# Altium PCB myMeteo_v0.PcbDoc
Units mm, origin at the board's own origin, x right, y up, seen from the top; angles counter-clockwise.
Board outline 72 x 30 mm, 4 copper layers (TOP, GND, PWR, BOT), stack 1.748 mm thick; 72 components, 64 nets, 324 pads, 142 vias.
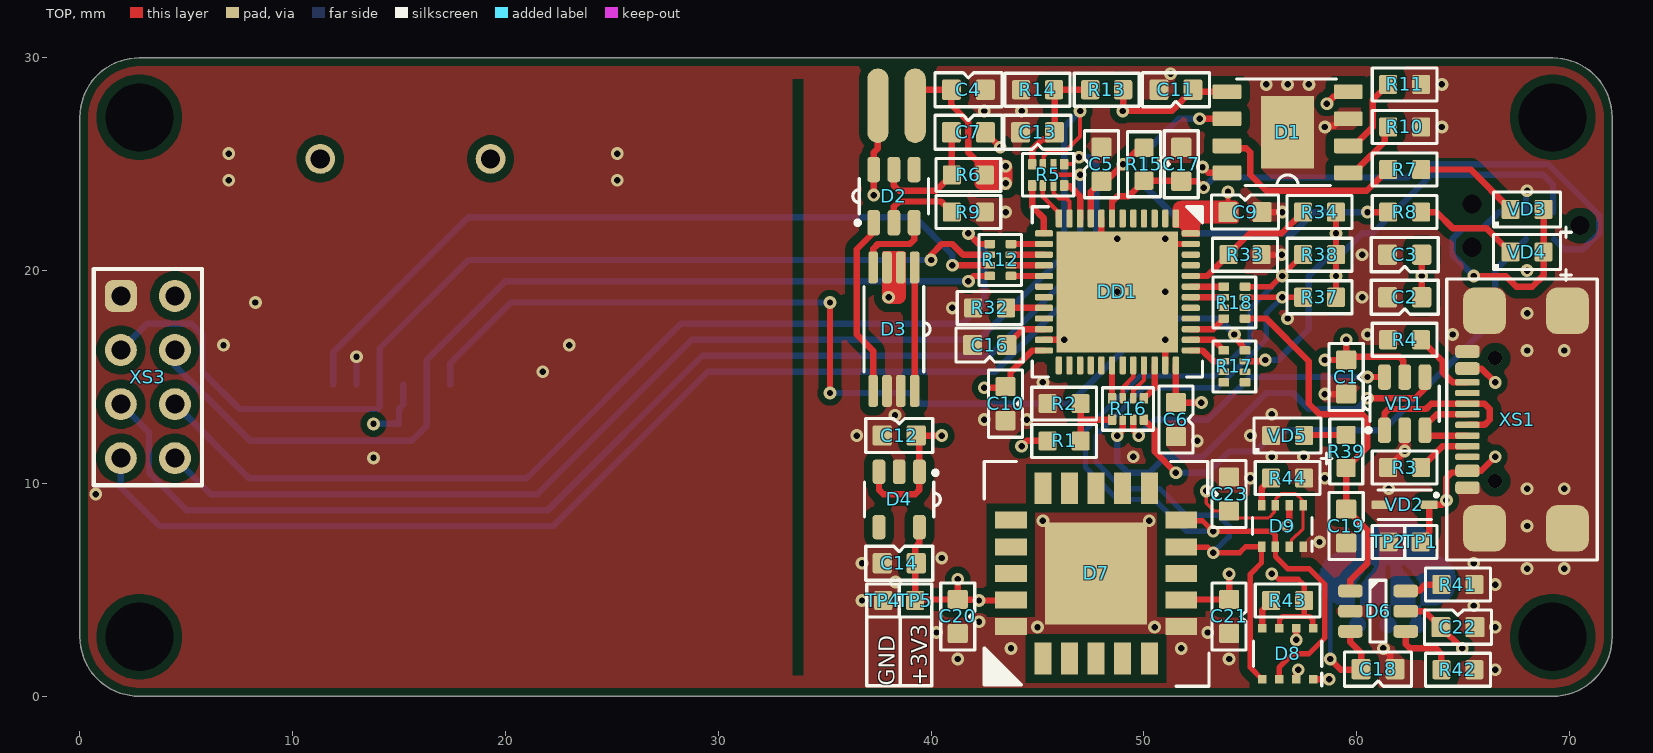
[diagram p0: TOP view]
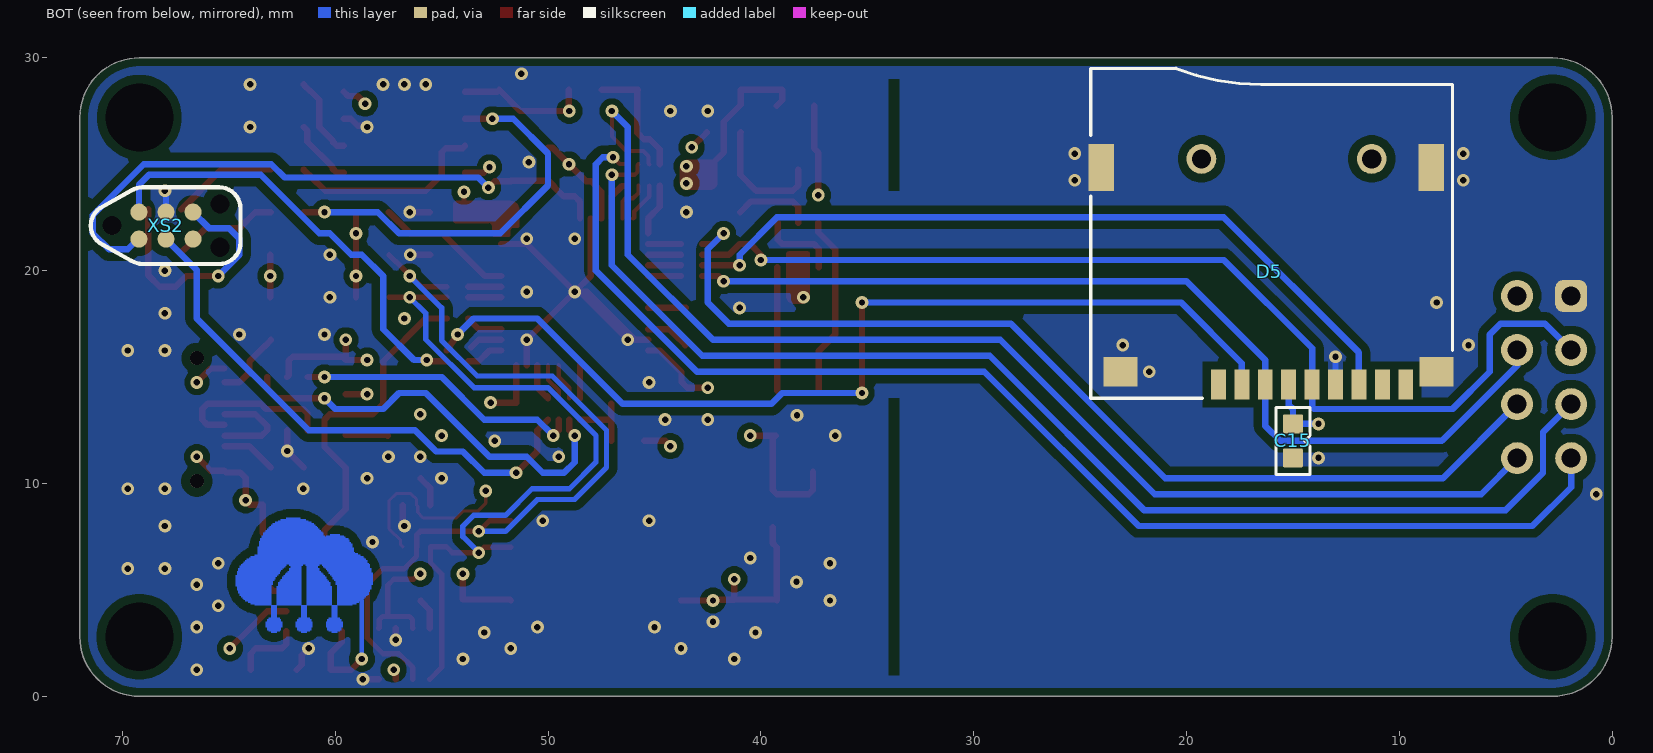
[diagram p1: BOT view, seen from below]
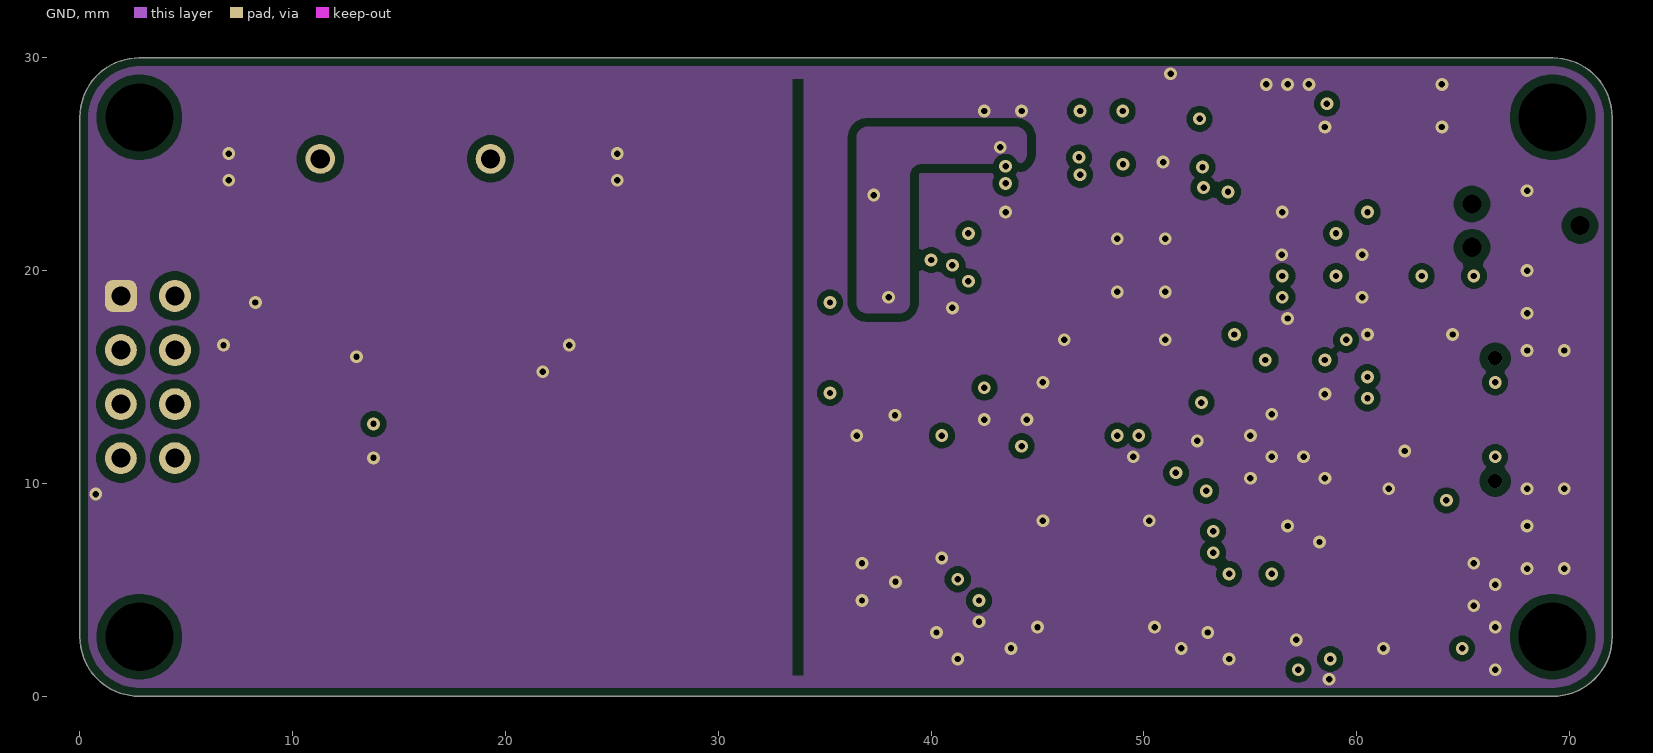
[diagram p2: GND]
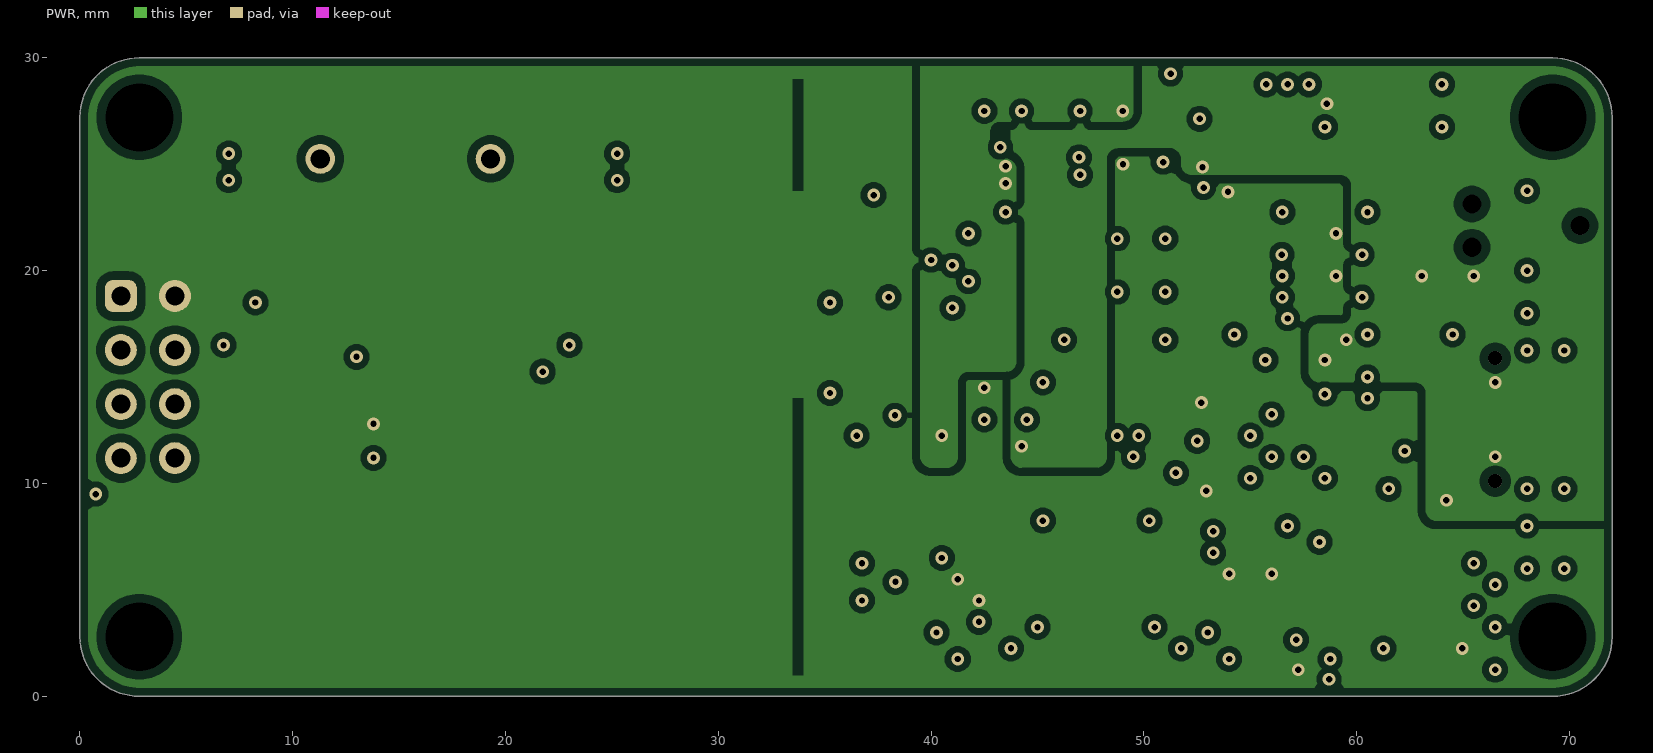
[diagram p3: PWR]
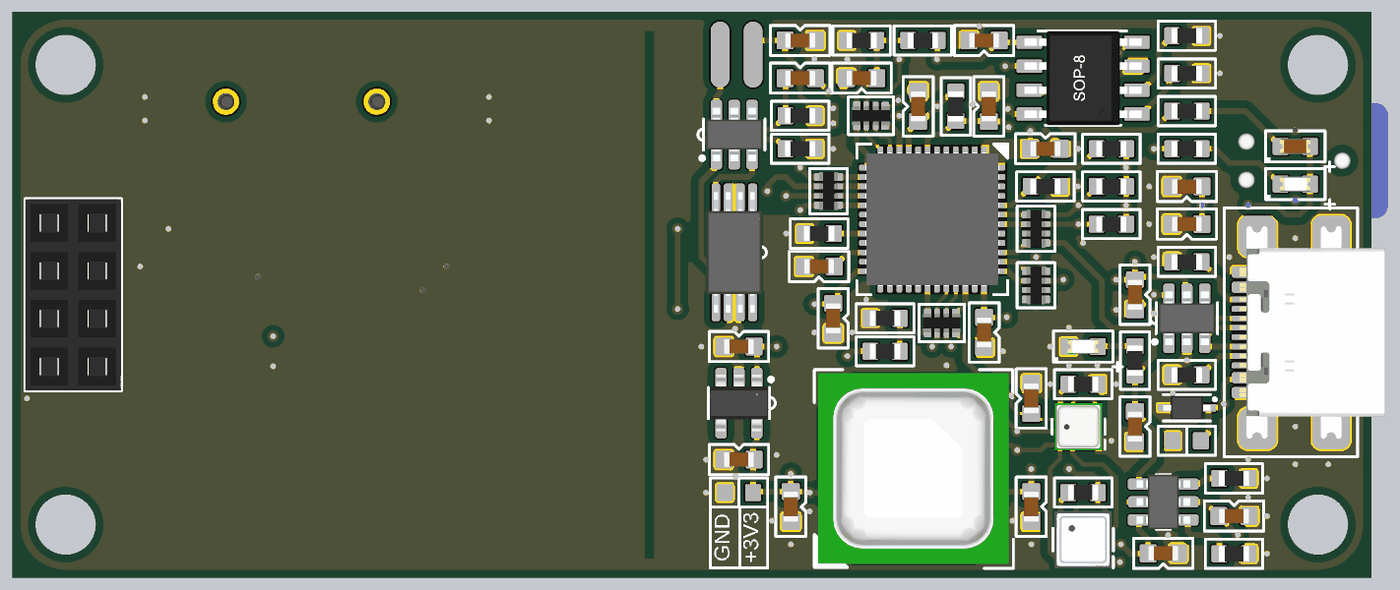
[diagram p4: 3D render of the assembled board from above, using the file's embedded part models]
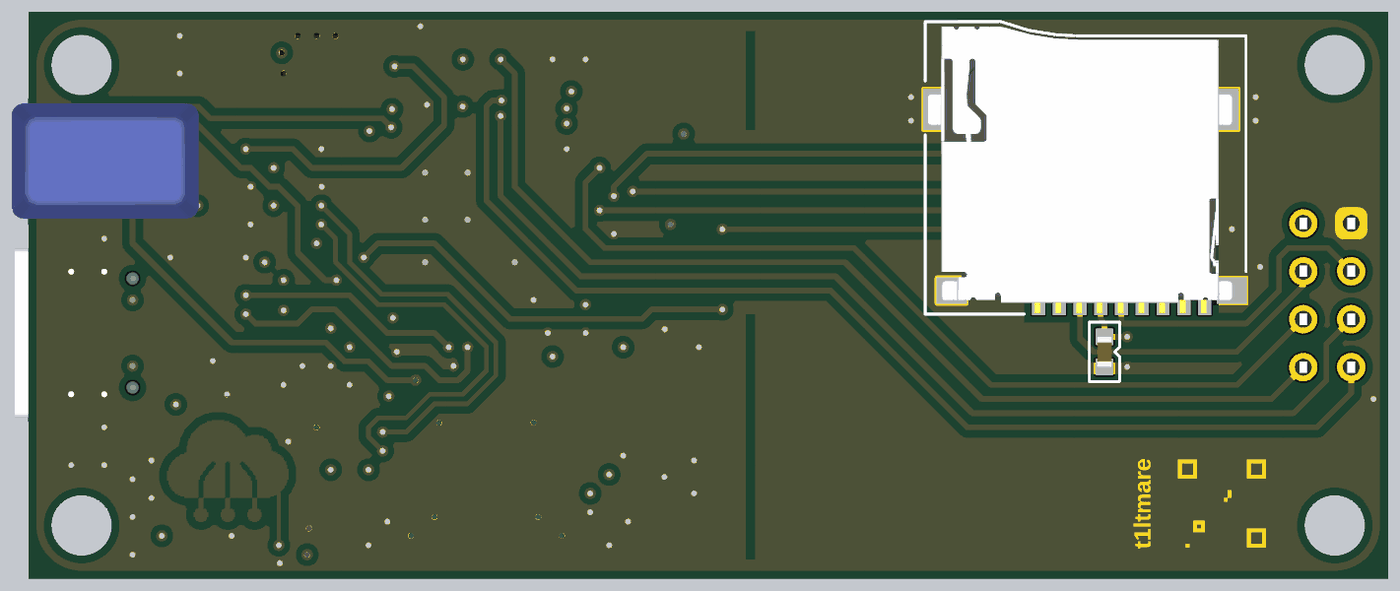
[diagram p5: 3D render of the assembled board from below, using the file's embedded part models]

## Layer stack, top to bottom
Top Solder: solder mask 0.0102, Solder Resist, Dk 3.5
TOP: signal copper 0.018
Dielectric 2: prepreg 0.0711, PP-006, Dk 4.1
GND: signal copper 0.035
Dielectric 1: dielectric 1.5, FR-4, Dk 4.8
PWR: signal copper 0.035
Dielectric 3: prepreg 0.0711, PP-006, Dk 4.1
BOT: signal copper 0.018
Bottom Solder: solder mask 0.0102, Solder Resist, Dk 3.5

## Board outline
2.8,0 cw(c2.8,2.8) 0,2.8 0,27.2 cw(c2.8,27.2) 2.8,30 69.2,30 cw(c69.2,27.2) 72,27.2 72,2.8 cw(c69.199,2.801) 69.2,0

## Design rules (kind name [scope] priority, off if disabled: settings)
AcuteAngle [All] p1: minimum=3.50000000000000E+0001 checktracksonly=FALSE
BoardOutlineClearance "BoardOutlineClearance 2" [All] p1: gap=0.4 ignorepadtopadclearanceinfootprint=FALSE // V-Cut
Clearance [All] p1: gap=0.2 ignorepadtopadclearanceinfootprint=FALSE except(0.15: Track-SMDPad Track-THPad SMDPad-SMDPad SMDPad-THPad THPad-THPad; 0.25: Arc-Hole Track-Hole SMDPad-Hole THPad-Hole Via-Hole Fill-Hole Region-Hole Text-Hole; 0.3: Via-Poly; 0.4: Arc-Poly Track-Poly SMDPad-Poly THPad-Poly Fill-Poly Poly-Poly Poly-Region Poly-Text Poly-Hole)
ComponentClearance [All] p1: gap=0 collisioncheckmode=3 verticalgap=0 showdistances=FALSE
DiffPairsRouting "DiffPairsRouting 1 Oz" [All] p1: maxlimit=0.254 minlimit=0.2 mostfreqgap=0.254 toplayer_minwidth=0.2 toplayer_maxwidth=0.381 toplayer_prefwidth=0.381 midlayer1_minwidth=0.2 midlayer1_maxwidth=0.381 midlayer1_prefwidth=0.381 midlayer2_minwidth=0.2 midlayer2_maxwidth=0.381 midlayer2_prefwidth=0.381 bottomlayer_minwidth=0.2 bottomlayer_maxwidth=0.381 bottomlayer_prefwidth=0.381 maxuncoupledlength=12.7
DiffPairsRouting "DiffPairsRouting 1/2 Oz" [All] p2: maxlimit=0.254 minlimit=0.1 mostfreqgap=0.254 toplayer_minwidth=0.1 toplayer_maxwidth=0.381 toplayer_prefwidth=0.381 midlayer1_minwidth=0.1 midlayer1_maxwidth=0.381 midlayer1_prefwidth=0.381 midlayer2_minwidth=0.1 midlayer2_maxwidth=0.381 midlayer2_prefwidth=0.381 bottomlayer_minwidth=0.1 bottomlayer_maxwidth=0.381 bottomlayer_prefwidth=0.381 maxuncoupledlength=12.7
Height [All] p1: minheight=0 maxheight=40 prefheight=12.7
HoleSize "Minimum HoleSize" [IsPad] p1: absolutevalues=TRUE maxlimit=5.9 minlimit=0.3 maxpercent=80.000 minpercent=20.000
HoleSize "Minimum HoleSize VIA 1" [IsVia] p2: absolutevalues=TRUE maxlimit=5.9 minlimit=0.3 maxpercent=80.000 minpercent=20.000 // Standart
HoleToHoleClearance Hole2HoleClearance [All] p1: gap=0 allowstackedmicrovias=FALSE
MinimumAnnularRing "Minimum AR VIA Standart" [IsVia] p1: minimumring=0.15
MinimumAnnularRing "Minimum AR PAD Standart" [IsPAD] p2: minimumring=0.1
MinimumSolderMaskSliver "SolderMask Bridge Advance" [All] p1: minsoldermaskwidth=0.2 // Mask LDI
PlaneClearance "PlaneClearance 3 Oz" [All] p1: clearance=0.25
PlaneConnect "TermalConnect 2 Oz" [All] p1: planeconnectstyle=Direct reliefexpansion=0.2 reliefentries=4 reliefconductorwidth=0.2 reliefairgap=0.2 // Standart
PolygonConnect "PolygonConnect-1 1 Oz_1" [All] p1: connectstyle=Direct reliefconductorwidth=0.2 reliefentries=4 polygonreliefangle="90 Angle" airgapwidth=0.2 // Standart
RoutingCorners [All] p1 off: cornerstyle=45-Degree minsetback=2.54 maxsetback=2.54
RoutingVias [All] p1: holewidth=0.3 width=0.6 viastyle="Through Hole" minholewidth=0.2 minwidth=0.4 maxholewidth=5.9 maxwidth=6.4
SMDEntry [All] p1: side=FALSE corner=FALSE anyangle=TRUE
SMDToCorner [All] p1: distance=0
SilkToSilkClearance Silk2SilkClearance [All] p1 off: silktosilkclearance=0.15
SilkToSolderMaskClearance Silk2SolderMaskClearance [IsPad] p1 off: minsilkscreentomaskgap=0.15 clearancetoexposedcopper=TRUE
SolderMaskExpansion [InPadClass('All Pads')] p1: expansion=0.1 istentingtop=FALSE
SolderMaskExpansion SolderMaskExpansion-1 [All] p2: expansion=0.1 istentingtop=FALSE // Standart
SupplyNets "Schematic Supply Nets_4" [InNet('GNDB')] p1: voltage=0.000
SupplyNets "Schematic Supply Nets_3" [InNet('GND')] p2: voltage=0.000
SupplyNets "Schematic Supply Nets_2" [InNet('+5V')] p3: voltage=0.000
SupplyNets "Schematic Supply Nets_1" [InNet('+3V3')] p4: voltage=0.000
SupplyNets "Schematic Supply Nets" [InNet('+4V2_BAT')] p5: voltage=0.000
Width "Width 1 Oz" [All] p1: maxlimit=10 minlimit=0.15 preferedwidth=0.3 checkconnectedcopper=TRUE
19 further rules are at their usual default settings.

## Classes and differential pairs
component class Sensors: C18 C19 C20 C21 C22 C23 D6 D7 D8 D9 R39 R41 R42 R43 R44 VD5
component class Power: C1 C2 C3 C4 C5 C6 C7 C9 C10 C11 C12 C13 C14 D1 D2 D3 D4 R1 R2 R3 R4 R6 R7 R8 R9 R10 R11 R13 R14 TP1 TP2 TP4 TP5 VD1 VD2 VD3 VD4 XS1
component class MCU: C15 C16 C17 D5 DD1 R5 R12 R15 R16 R17 R18 R32 R33 R34 R37 R38 XS2 XS3

## Components (designator, comment, footprint, x,y, rotation, side; value= is the part's Value field where it differs from the comment)
C1 "CAPACITOR" CAP_0603 59.5,15 r270 top value=0,1uF
C2 "CAPACITOR" CAP_0603 62.25,18.75 r180 top value=10,0uF
C3 "CAPACITOR" CAP_0603 62.25,20.75 r180 top value=0,1uF
C4 "CAPACITOR" CAP_0603 41.75,28.5 r0 top value=10,0uF
C5 "CAPACITOR" CAP_0603 48,25 r90 top value=0,1uF
C6 "CAPACITOR" CAP_0603 51.5,13 r270 top value=0,1uF
C7 "CAPACITOR" CAP_0603 41.75,26.5 r0 top value=0,1uF
C9 "CAPACITOR" CAP_0603 54.75,22.75 r0 top value=0,1uF
C10 "CAPACITOR" CAP_0603 43.5,13.75 r270 top value=0,1uF
C11 "CAPACITOR" CAP_0603 51.5,28.5 r180 top value=0,1uF
C12 "CAPACITOR" CAP_0603 38.5,12.25 r0 top value=1,0uF
C13 "CAPACITOR" CAP_0603 45,26.5 r180 top value=0,1uF
C14 "CAPACITOR" CAP_0603 38.5,6.25 r0 top value=1,0uF
C15 "CAPACITOR" CAP_0603 15,12 r270 bottom value=0,1uF
C16 "CAPACITOR" CAP_0603 42.75,16.5 r180 top value=2,2uF
C17 "CAPACITOR" CAP_0603 51.75,25 r90 top value=0,1uF
C18 "CAPACITOR" CAP_0603 61,1.275 r180 top value=22pF
C19 "CAPACITOR" CAP_0603 59.5,8 r270 top value=10,0uF
C20 "CAPACITOR" CAP_0603 41.25,3.75 r270 top value=0,1uF
C21 "CAPACITOR" CAP_0603 54,3.75 r270 top value=0,1uF
C22 "CAPACITOR" CAP_0603 64.75,3.25 r0 top value=0,1uF
C23 "CAPACITOR" CAP_0603 54,9.5 r90 top value=0,1uF
D1 "TP4056" ESOP-8 56.75,26.5 r180 top
D2 "DW01A" SOT-23-6 38.25,23.5 r90 top
D3 "FS8205A" TSSOP-8 38.25,17.25 r270 top
D4 "TPS7A02" SOT-23-5 38.5,9.25 r270 top
D5 "KLS1-TF-003" KLS1-TF-003 16.25,25.25 r0 bottom
D6 "TTP223-BA6" SOT-23-6L_1 61,4 r0 top
D7 "SCD41" SCD41 47.75,5.775 r90 top
D8 "BME_SENSOR" BME688 56.75,2 r270 top value=BME688
D9 "BME_SENSOR" BME280 56.5,8 r270 top value=BME280
DD1 "STM32F411CEU6" UFQFPN48 48.75,19 r270 top
R1 "RESISTOR" RES_0603 46.25,12 r180 top value=6,2K
R2 "RESISTOR" RES_0603 46.25,13.75 r0 top value=12K
R3 "RESISTOR" RES_0603 62.25,10.75 r180 top value=5,1K
R4 "RESISTOR" RES_0603 62.25,16.75 r180 top value=5,1K
R5 "RESISTOR_ARRAY" RES_ARRAY_0804_CONVEX 45.5,24.5 r180 top value=33
R6 "RESISTOR" RES_0603 41.75,24.5 r180 top value=100
R7 "RESISTOR" RES_0603 62.25,24.75 r180 top value=3K
R8 "RESISTOR" RES_0603 62.25,22.75 r180 top value=3K
R9 "RESISTOR" RES_0603 41.75,22.75 r180 top value=1K
R10 "RESISTOR" RES_0603 62.25,26.75 r0 top value=0
R11 "RESISTOR" RES_0603 62.25,28.75 r0 top value=5,1K
R12 "RESISTOR_ARRAY" RES_ARRAY_0804_CONVEX 43.25,20.5 r270 top value=33
R13 "RESISTOR" RES_0603 48.25,28.5 r0 top value=2,7K
R14 "RESISTOR" RES_0603 45,28.5 r0 top value=3,9K
R15 "RESISTOR" RES_0603 50,25 r90 top value=10K
R16 "RESISTOR_ARRAY" RES_ARRAY_0804_CONVEX 49.25,13.5 r0 top value=33
R17 "RESISTOR_ARRAY" RES_ARRAY_0804_CONVEX 54.25,15.5 r90 top value=33
R18 "RESISTOR_ARRAY" RES_ARRAY_0804_CONVEX 54.25,18.5 r270 top value=33
R32 "RESISTOR" RES_0603 42.75,18.25 r180 top value=10K
R33 "RESISTOR" RES_0603 54.75,20.75 r0 top value=10K
R34 "RESISTOR" RES_0603 58.25,22.75 r0 top value=-
R37 "RESISTOR" RES_0603 58.25,18.75 r0 top value=5,1K
R38 "RESISTOR" RES_0603 58.25,20.75 r0 top value=5,1K
R39 "RESISTOR" RES_0603 59.5,11.5 r270 top value=3K
R41 "RESISTOR" RES_0603 64.75,5.25 r0 top value=100
R42 "RESISTOR" RES_0603 64.75,1.25 r0 top value=100
R43 "RESISTOR" RES_0603 56.75,4.5 r0 top value=10K
R44 "RESISTOR" RES_0603 56.75,10.25 r0 top value=10K
TP1 "TEST_POINT" TP-SMD-R0.9x0.85 63,7.25 r0 top value=TP
TP2 "TEST_POINT" TP-SMD-R0.9x0.85 61.5,7.25 r180 top value=TP
TP4 "TEST_POINT" TP-SMD-R0.9x0.85 37.75,4.5 r180 top value=TP
TP5 "TEST_POINT" TP-SMD-R0.9x0.85 39.25,4.5 r0 top value=TP
VD1 "USBLC6-2SC6" SOT-23-6 62.25,13.75 r90 top
VD2 "ZENER BIDIR" SOD-323F-NO-CATHODE 62.25,9 r180 top value=PESD5V0L1BA
VD3 "LED" LED_0603_R 68,22.875 r0 top value=FYLS-0603URC
VD4 "LED" LED_0603_G 68,20.875 r0 top value=FYLS-0603UGC
VD5 "LED" LED_0603_G 56.75,12.25 r0 top value=FYLS-0603UGC
XS1 "USB3.1TYPE-C 16PF-26" "USB3.1TYPE-C 16PF-26" 72.75,13 r90 top value="USB3.1 TYPE-C 16PF-026"
XS2 "HEADER-3x2-F" TC2030-MCP-NL 67.95,22.115 r180 bottom value=TC2030-MCP-NL
XS3 "HEADER-4x2-F" PBD-8 1.93,18.81 r270 top value=DS1023-2x4

## Footprints (in the part's own frame and the unit in brackets; to place one, negate y for a bottom-side part, rotate by r counter-clockwise, add the part's x,y. Pads: shape width x height; smd on the part's side, far side on the other; paste and mask are expansions set on the pad)
BME280 [mm]
  rect 0.5x0.35 smd: 1(0.975,0.975) 2(0.975,0.325) 3(0.975,-0.325) 4(0.975,-0.975) 5(-0.975,-0.975) 6(-0.975,-0.325) 7(-0.975,0.325) 8(-0.975,0.975)
  silkscreen extent -0.4,-1.4 1.2,1.4, body extent -1.25,-1.25 1.25,1.25, height 0.93
BME688 [mm]
  rect 0.4x0.4 smd: 1(1.2,1.2) 2(1.2,0.4) 3(1.2,-0.4) 4(1.2,-1.2) 5(-1.2,-1.2) 6(-1.2,-0.4) 7(-1.2,0.4) 8(-1.2,1.2)
  silkscreen extent -0.6,-1.6 1.5,1.6, body extent -1.5,-1.5 1.5,1.5, height 0.93
CAP_0603 [mm] "Chip Capacitor, 2-Leads, Body 1,60x0,80mm, IPC Medium Density"
  rrect20% 0.9x0.95 smd: 1(-0.8,0) 2(0.8,0)
  silkscreen extent -1.58,-0.8 1.58,0.8, body extent -0.8,-0.4 0.8,0.4, height 0.6
ESOP-8 [mm] "ESOP-8"
  rect 2.5x3.4 smd: 0(0,0)
  rrect20% 1.35x0.7 smd: 1(-2.85,1.905) 2(-2.85,0.635) 3(-2.85,-0.635) 4(-2.85,-1.905) 5(2.85,-1.905) 6(2.85,-0.635) 7(2.85,0.635) 8(2.85,1.905)
  silkscreen extent -2.3,-2.5 2.4,2.5, body extent -3.11,-2.5 3.11,2.5, height 1.87
KLS1-TF-003 [mm]
  rect 0.7x1.4 smd mask+0.075: 1(2.25,10.6) 2(1.15,10.6) 3(0.05,10.6) 4(-1.05,10.6) 5(-2.15,10.6) 6(-3.25,10.6) 7(-4.35,10.6) 8(-5.45,10.6) 9(-6.55,10.6)
  rect 1.6x1.4 smd mask+0.075: 10(-8,10)
  rect 1.2x2.2 smd: 11(-7.75,0.4) 12(7.75,0.4)
  rect 1.6x1.4 smd: 13(6.85,10)
  round 1.4 hole 0.9: 14(3.05,0) 15(-4.95,0)
  silkscreen extent -8.75,-4.26 8.25,11.25, body extent -8,-3.99 8.1,11.21, height 1.85
LED_0603_G [mm] "LEDS 0603 Foryard, Body 1,6 x 0,8mm"
  rrect20% 0.85x0.9 smd: A(0.775,0) K(-0.775,0)
  silkscreen extent -1.58,-1.32 2.07,0.82, body extent -0.81,-0.4 0.81,0.4, height 0.6
LED_0603_R [mm] "LEDS 0603 Foryard, Body 1,6 x 0,8mm"
  rrect20% 0.85x0.9 smd: A(0.775,0) K(-0.775,0)
  silkscreen extent -1.58,-1.32 2.07,0.82, body extent -0.81,-0.4 0.81,0.4, height 0.6
PBD-8 [mm] "Header 4x2 Female, Vertical, pitch 2,54"
  rrect50% 1.5x1.5 hole 0.9: 1(0,0)
  round 1.5 hole 0.9: 2(0,2.54) 3(2.54,0) 4(2.54,2.54) 5(5.08,0) 6(5.08,2.54) 7(7.62,0) 8(7.62,2.54)
  silkscreen extent -1.27,-1.27 8.89,3.81, body extent -1.27,-1.27 8.89,3.81, height 8.5
RES_0603 [mm] "Chip Resistor, 2-Leads, Body 1,60x0,80mm, IPC Medium Density"
  rrect20% 0.85x0.9 smd: 1(-0.775,0) 2(0.775,0)
  silkscreen extent -1.53,-0.77 1.53,0.77, body extent -0.8,-0.4 0.8,0.4, height 0.45
RES_ARRAY_0804_CONVEX [mm] "CAY10 Series - Chip Resistor Array"
  rrect25% 0.4x0.5 smd mask+0.025: 1(-0.75,-0.5) 4(0.75,-0.5) 5(0.75,0.5) 8(-0.75,0.5)
  rrect25% 0.3x0.5 smd mask+0.025: 2(-0.25,-0.5) 3(0.25,-0.5) 6(0.25,0.5) 7(-0.25,0.5)
  silkscreen extent -1.2,-1 1.2,1, body extent -1,-0.5 1,0.5, height 0.36
SCD41 [mm]
  rect 1.5x0.8 smd: 1(-4,2.5) 2(-4,1.25) 3(-4,0) 4(-4,-1.25) 5(-4,-2.5) 11(4,-2.5) 12(4,-1.25) 13(4,0) 14(4,1.25) 15(4,2.5)
  rect 0.8x1.5 smd: 6(-2.5,-4) 7(-1.25,-4) 8(0,-4) 9(1.25,-4) 10(2.5,-4) 16(2.5,4) 17(1.25,4) 18(0,4) 19(-1.25,4) 20(-2.5,4)
  rect 4.8x4.8 smd: 21(0,0)
  silkscreen extent -5.3,-5.3 5.25,5.25, body extent -5.05,-5.05 5.05,5.05, height 6.28
SOD-323F-NO-CATHODE [mm] "SOD-323F"
  rrect20% 0.8x0.4 smd: 1(-1.15,0) 2(1.15,0)
  silkscreen extent -1.25,-0.7 1.25,0.7, body extent -1.25,-0.63 1.25,0.63, height 0.65
SOT-23-5 [mm] "SOT-23-5"
  rrect50% 1.15x0.6 smd mask+0.075: 1(-1.3,0.95) 2(-1.3,0) 3(-1.3,-0.95) 4(1.3,-0.95) 5(1.3,0.95)
  silkscreen extent -1.35,-1.63 0.82,1.93, body extent -1.5,-1.52 1.5,1.52, height 1.45
SOT-23-6 [mm] "SOT-23-6"
  rrect50% 1.2x0.6 smd mask+0.075: 1(-1.25,0.95) 2(-1.25,0) 3(-1.25,-0.95) 4(1.25,-0.95) 5(1.25,0) 6(1.25,0.95)
  silkscreen extent -1.35,-1.63 0.82,1.93, body extent -1.43,-1.5 1.43,1.5, height 1.4
SOT-23-6L_1 [mm]
  rrect50% 1.15x0.6 smd mask+0.075: 1(-1.3,0.95) 2(-1.3,0) 3(-1.3,-0.95) 4(1.3,-0.95) 5(1.3,0) 6(1.3,0.95)
  silkscreen extent -0.38,-1.45 0.38,1.45, body extent -1.43,-1.45 1.43,1.45, height 1.26
TC2030-MCP-NL [mm] "Conector ICD en placa"
  round 0.8 smd paste-0.4: 1(-1.27,-0.635) 2(-1.27,0.635) 3(0,-0.635) 4(0,0.635) 5(1.27,-0.635) 6(1.27,0.635)
  round 0.85 hole 0.9 unplated mask+0: ""(-2.54,0) ""(2.54,-1.016) ""(2.54,1.016)
  silkscreen extent -3.54,-1.8 3.5,1.8, body extent -4.95,-3.05 4.95,3.05, height 27.67
TP-SMD-R0.9x0.85 [mm]
  rrect20% 0.85x0.9 smd: 1(0,0)
  silkscreen extent -0.75,-0.77 0.78,0.77
TSSOP-8 [mm]
  rrect50% 1.5x0.45 smd: 1(-2.9,0.975) 2(-2.9,0.325) 3(-2.9,-0.325) 4(-2.9,-0.975) 5(2.9,-0.975) 6(2.9,-0.325) 7(2.9,0.325) 8(2.9,0.975)
  silkscreen extent -2,-1.4 2,1.7, body extent -3.2,-1.47 3.2,1.47, height 1.2
UFQFPN48 [mm]
  rrect50% 0.85x0.3 smd: 1(-3.45,2.75) 2(-3.45,2.25) 3(-3.45,1.75) 4(-3.45,1.25) 5(-3.45,0.75) 6(-3.45,0.25) 7(-3.45,-0.25) 8(-3.45,-0.75) 9(-3.45,-1.25) 10(-3.45,-1.75) 11(-3.45,-2.25) 12(-3.45,-2.75) 25(3.45,-2.75) 26(3.45,-2.25) 27(3.45,-1.75) 28(3.45,-1.25) 29(3.45,-0.75) 30(3.45,-0.25) 31(3.45,0.25) 32(3.45,0.75) 33(3.45,1.25) 34(3.45,1.75) 35(3.45,2.25) 36(3.45,2.75)
  rrect50% 0.3x0.85 smd: 13(-2.75,-3.45) 14(-2.25,-3.45) 15(-1.75,-3.45) 16(-1.25,-3.45) 17(-0.75,-3.45) 18(-0.25,-3.45) 19(0.25,-3.45) 20(0.75,-3.45) 21(1.25,-3.45) 22(1.75,-3.45) 23(2.25,-3.45) 24(2.75,-3.45) 37(2.75,3.45) 38(2.25,3.45) 39(1.75,3.45) 40(1.25,3.45) 41(0.75,3.45) 42(0.25,3.45) 43(-0.25,3.45) 44(-0.75,3.45) 45(-1.25,3.45) 46(-1.75,3.45) 47(-2.25,3.45) 48(-2.75,3.45)
  rect 5.7x5.7 smd: 49(0,0)
  silkscreen extent -4,-4 4,4, body extent -3.55,-3.55 3.55,3.55, height 0.6
"USB3.1TYPE-C 16PF-26" [mm] "RUICHI USB3.1 TYPE-C  as USB2.0. Original: USB4110-GF_A"
  rrect50% 0.6x1.15 smd: A1(-3.2,7.55) A4(-2.4,7.55) A9(2.4,7.55) A12(3.2,7.55)
  rrect50% 0.3x1.15 smd: A5(-1.25,7.55) A6(-0.25,7.55) A7(0.25,7.55) A8(1.25,7.55) B5(1.75,7.55) B6(0.75,7.55) B7(-0.75,7.55) B8(-1.75,7.55)
  rrect50% 2.18x2 smd: S1(-5.11,6.75) S1(-5.11,2.85) S1(5.11,6.75) S1(5.11,2.85)
  round 0.65 hole 0.65 unplated: ""(-2.89,6.25) ""(2.89,6.25)
  silkscreen extent -6.6,1.45 6.6,9.08, body extent -5.65,0 5.65,7.7, height 3.26

## Part data
C1 C3 C5 C6 C7 C9 C10 C11 C13 C15 C17 C20 C21 C22 C23: library part CAP_CER_0603_104_25_10_X7R, "Ceramic Capacitor SMD_0603 X7R", Dielectric=X7R, Manufacturer=Yageo, Manufacturer Part Number=CC0603KRX7R8BB104, Tolerance=10%, Voltage=25V, Part Number=CAP_CER_0603_104_25_10_X7R, Part Type=0603, Size=0603
C2 C19: library part CAP_CER_0603_106_25_10_X5R, "Ceramic Capacitor SMD_0603 X5R", Dielectric=X5R, Manufacturer=Yageo, Manufacturer Part Number=CC0603KRX5R8BB106, Tolerance=10%, Voltage=25V, Part Number=CAP_CER_0603_106_25_10_X5R, Part Type=0603, Replace=GRM188R61E106KA73D, Size=0603
C4: library part CAP_CER_0603_106_10_10_X5R, "Ceramic Capacitor SMD_0603 X5R", Dielectric=X5R, Manufacturer=Yageo, Manufacturer Part Number=CC0603KRX5R6BB106, Tolerance=10%, Voltage=10V, Part Number=CAP_CER_0603_106_10_10_X5R, Part Type=0603, Size=0603
C12 C14: library part CAP_CER_0603_105_25_10_X5R, "Ceramic Capacitor SMD_0603 X5R", Dielectric=X5R, Manufacturer=Yageo, Manufacturer Part Number=CC0603KRX5R8BB105, Tolerance=10%, Voltage=25V, Part Number=CAP_CER_0603_105_25_10_X5R, Part Type=0603, Size=0603
C16: library part CAP_CER_0603_225_10_10_X5R, "Ceramic Capacitor SMD_0603 X5R", Dielectric=X5R, Manufacturer=Yageo, Manufacturer Part Number=CC0603KRX5R6BB225, Tolerance=10%, Voltage=10V, Part Number=CAP_CER_0603_225_10_10_X5R, Part Type=0603, Size=0603
C18: library part CAP_CER_0603_220_50_5_C0G, "Ceramic Capacitor SMD_0603 C0G", Dielectric=C0G, Manufacturer=Yageo, Manufacturer Part Number=CC0603JRNPO9BN220, Tolerance=5%, Voltage=50V, Part Number=CAP_CER_0603_220_50_5_C0G, Part Type=0603, Size=0603
D1: "1A Standalone Linear Li-Ion Battery Charger", Manufacturer=UMW, Manufacturer Part Number=TP4056, Part Number=TP4056, Part Type=POWER, Size=ESOP-8
D2: "The DW01A battery protection IC is designed to / protect lithium-ion/polymer battery from damage or / degrading the lifetime due to overcharge, / overdischarge, and/or overcurrent for one-cell / lithium-ion/polymer battery powered systems, such as / cellular phones", Manufacturer=-, Manufacturer Part Number=DW01A, Part Number=DW01A, Part Type=POWER, Size=SOT-23-6
D3: "Dual N-Channel Enhancement Mode Power MOSFET", Manufacturer="Tech Public", Manufacturer Part Number=FS8205A, Part Number=FS8205A, Part Type=POWER, Size=TSSOP-8
D4: "TPS7A02 Nanopower IQ, 25-nA, 200-mA, Low-Dropout Voltage Regulator With Fast / Transient Response", Manufacturer="Texas Instruments", Manufacturer Part Number=TPS7A0236PDBVR, Part Number=TPS7A02, Part Type=LDO, Size=SOT-23-5
D5: "microSD Card Connector", Manufacturer=KLS, Manufacturer Part Number=KLS1-TF-003, Part Number=KLS1-TF-003, Part Type=CARD
D6: "A touch pad detector", Manufacturer=Tontek, Manufacturer Part Number=TTP223-BA6, Part Number=TTP223-BA6, Part Type=LOGIC, Size=SOT-23-6L_1
D8: library part BME688, Manufacturer=BME688, Manufacturer Part Number=BME688, Part Number=BME688, Part Type=LOGIC, Size=SMD-8P
D9: library part BME280, Manufacturer=BME280, Manufacturer Part Number=BME280, Part Number=BME280, Part Type=LOGIC, Size=LGA-8(2.5x2.5)
DD1: "Arm Cortex-M4 32b MCU+FPU, 125 DMIPS, 512KB Flash, /  128KB RAM, USB OTG FS, 11 TIMs, 1 ADC, 13 comm. interfaces", Manufacturer=STMicroelectronics, Mouser Part Number=511-STM32F411CEU6, Arrow Part Number=STM32F411CEU6, Arrow Price/Stock=https://www.arrow.com/en/products/stm32f411ceu6/stmicroelectronics?utm_currency=USD&region=nac, Datasheet Link=http://www.st.com/content/ccc/resource/technical/document/datasheet/b3/a5/46/3b/b4/e5/4c/85/DM00115249.pdf/files/DM00115249.pdf/jcr:content/translations/en.DM00115249.pdf, Geometry.Height=0.6mm, Manufacturer Part Number=STM32F411CEU6, Manufacturer_Name=STMicroelectronics, Manufacturer_Part_Number=STM32F411CEU6, Mouser Price/Stock=https://www.mouser.co.uk/ProductDetail/STMicroelectronics/STM32F411CEU6?qs=pjMTYa9MTGV3ou31YBFa3g%3D%3D, Part Number=STM32F411CEU6, Part Type=MCU, Size=UFQFPN48
R1: library part RES_SMD_0603_6K2_5%, "Resistor fixed SMD_0603 5%", Manufacturer=Yageo, Manufacturer Part Number=RC0603JR-076K2L, Power=100mW, Tolerance=5%, Part Number=RES_SMD_0603_6K2_5%, Part Type=0603, Size=0603
R2: library part RES_SMD_0603_12K_1%, "Resistor fixed SMD_0603 1%", Manufacturer=Yageo, Manufacturer Part Number=RC0603FR-0712KL, Power=100mW, Tolerance=1%, Part Number=RES_SMD_0603_12K_1%, Part Type=0603, Size=0603
R3 R4 R11 R37 R38: library part RES_SMD_0603_5K1_5%, "Resistor fixed SMD_0603 5%", Manufacturer=Yageo, Manufacturer Part Number=RC0603JR-075K1L, Power=100mW, Tolerance=5%, Part Number=RES_SMD_0603_5K1_5%, Part Type=0603, Size=0603
R5 R12 R16 R17 R18: library part RES_ARR_CAY10_33R, "CAY10 Series - Chip Resistor Array", Manufacturer=Yageo, Manufacturer Part Number=YC124-JR-0733RL, Power=31mW, Tolerance=5%, Part Number=RES_ARR_CAY10_33R, Part Type=ARRAY, Replace=CAY10-330J4LF, Size=0804
R6 R41 R42: library part RES_SMD_0603_100R_5%, "Resistor fixed SMD_0603 5%", Manufacturer=Yageo, Manufacturer Part Number=RC0603JR-07100RL, Power=100mW, Tolerance=5%, Part Number=RES_SMD_0603_100R_5%, Part Type=0603, Size=0603
R7 R8 R39: library part RES_SMD_0603_3K_5%, "Resistor fixed SMD_0603 5%", Manufacturer=Yageo, Manufacturer Part Number=RC0603JR-073KL, Power=100mW, Tolerance=5%, Part Number=RES_SMD_0603_3K_5%, Part Type=0603, Size=0603
R9: library part RES_SMD_0603_1K_5%, "Resistor fixed SMD_0603 5%", Manufacturer=Yageo, Manufacturer Part Number=RC0603JR-071KL, Power=100mW, Tolerance=5%, Part Number=RES_SMD_0603_1K_5%, Part Type=0603, Size=0603
R10: library part RES_SMD_0603_0R_5%, "Resistor fixed SMD_0603 5%", Manufacturer=Yageo, Manufacturer Part Number=RC0603JR-070RL, Power=100mW, Tolerance=5%, Part Number=RES_SMD_0603_0R_5%, Part Type=0603, Size=0603
R13: library part RES_SMD_0603_2K7_5%, "Resistor fixed SMD_0603 5%", Manufacturer=Yageo, Manufacturer Part Number=RC0603JR-072K7L, Power=100mW, Tolerance=5%, Part Number=RES_SMD_0603_2K7_5%, Part Type=0603, Size=0603
R14: library part RES_SMD_0603_3K9_5%, "Resistor fixed SMD_0603 5%", Manufacturer=Yageo, Manufacturer Part Number=RC0603JR-073K9L, Power=100mW, Tolerance=5%, Part Number=RES_SMD_0603_3K9_5%, Part Type=0603, Size=0603
R15 R32 R33 R34 R43 R44: library part RES_SMD_0603_10K_5%, "Resistor fixed SMD_0603 5%", Manufacturer=Yageo, Manufacturer Part Number=RC0603JR-0710KL, Power=100mW, Tolerance=5%, Part Number=RES_SMD_0603_10K_5%, Part Type=0603, Size=0603
TP1 TP2 TP4 TP5: library part TP-SMD-R0.9x0.85, "Test Point, SMP Pad, 0.9x0.85mm", Part Number=TP-SMD-R0.9x0.85, Part Type=TP-SMD-R0.9x0.85
VD1: "Low Capacitance 2-Line ESD Protection for USB Protection", Manufacturer=UMW, Voltage=5V, Manufacturer Part Number=USBLC6-2SC6, Part Number=USBLC6-2SC6, Part Type=ESD, Replace="USBLC6-2SC6 (STM)", Size=SOT-23-6
VD2: library part PESD5V0L1BA, "Low Capacitance Bidirectional ESD Protection Diode", Manufacturer=UMW, Voltage=5V, Manufacturer Part Number=PESD5V0L1BA, Part Number=PESD5V0L1BA, Part Type=ESD, Size=SOD-323
VD3: library part FYLS-0603URC, "SMD 0603 LED Red", Manufacturer=Foryard, Manufacturer Part Number=FYLS-0603URC, Part Number=FYLS-0603URC, Part Type=LED, Size=0603
VD4 VD5: library part FYLS-0603UGC, "SMD 0603 LED Green", Manufacturer=Foryard, Manufacturer Part Number=FYLS-0603UGC, Part Number=FYLS-0603UGC, Part Type=LED, Replace=BL-HGE36G-AV-TR8, Size=0603
XS1: library part "USB3.1 TYPE-C 16PF-026", "USB3.1 as USB2.0. Original: USB4110-GF_A", Manufacturer=RUICHI, Manufacturer Part Number="RUICHI USB3.1 TYPE-C", Part Number="USB3.1 TYPE-C 16PF-026", Part Type=PC, Replace="USB4110-GF-A (GCT)"
XS2: library part TC2030-MCP-NL, "Tag connector 2x3", Manufacturer="Tag Connect", Manufacturer Part Number=TC2030-MCP-NL, Part Number=TC2030-MCP-NL, Part Type=HEADER
XS3: library part PBD-8, "Female Socket Header Through Hole 8 (2x4) Position 0.100\" (2.54mm)", Manufacturer=Connfly, Manufacturer Part Number=DS1023-2x4S21, Part Number=PBD-8, Part Type=HEADER, Replace=PBD-8
D7: Manufacturer=SCD41, Manufacturer Part Number=SCD41, Part Number=SCD41, Part Type=LOGIC, Replace="The SCD4x is SensirionвЂ™s next generation miniature CO2 / sensor", Size=SCD41

## Free pads (board coordinates)
  oval 1x3.5 smd: +4V2_BAT(39.25,27.75) GNDB(37.5,27.75)
  round 0 hole 3.2 unplated: MH(2.8,2.8) MH(2.8,27.2) MH(69.2,2.8) MH(69.2,27.2)

## Via types
v1: diameter 0.6, hole 0.3, TOP to BOT, tented both sides, 142 vias

## Nets (pads, with @x,y where several pads share a name; then routed paths per layer and width w, separated by ;. In a path a pad name is that pad's centre, name@x,y a point inside that pad or via, vN(x,y) a via of type N, cw(c..) or ccw(c..) an arc to the next point about the centre after c; other vN are vias at no path point)
+3V3: C5.1 C6.1 C9.1 C10.1 C14.2 C15.1 C20.1 C21.1 C22.1 C23.1 D4.5 D5.4 D6.5 D7.7 D7.19 D8.2 D8.6 D8.8 D9.2 D9.6 D9.8 DD1.1 DD1.9 DD1.24 DD1.36 DD1.48 R15.2 R34.2 R37.2 R38.2 R43.2 TP5.1 XS3.2 | length 50.3
  TOP w0.15: v1(52.924,9.65) 52.924,9.076 53.3,8.7 C23.1 54.325,8.375 55.854,8.375 56.125,8.646 56.125,8.925 D9.6 56.175,9.25 56.45,9.525 57.125,9.525 57.475,9.175 D9.8 57.475,7.88 56.925,7.33 56.925,7.125 D9.2
  TOP w0.25: C9.1 v1(53.95,23.7) ; v1(56,5.75) 56.071,5.75 56.321,5.5 57.25,5.5 57.525,5.225 R43.2 57.525,3.775 57.5,3.75 ; D8.6 56.365,3.215 56.365,3.604 56.512,3.75 57.5,3.75 ; D8.8 57.923,3.227 57.923,3.604 57.777,3.75 57.5,3.75
  TOP w0.3: D4.5 39.45,7.2 39.25,7 TP5.1 39.3,4.55 C20.1 ; v1(41.25,5.5) C20.1 ; v1(42.5,14.5) 43.45,14.5 C10.1 43.729,14.779 43.729,15.229 44.75,16.25 DD1.24 ; D7.19@43.75,4.5 v1(42.25,4.5) 42.211,4.539 41.261,4.539 C20.1 ; DD1.9 47.5,23.7 47.675,23.875 47.675,23.9 47.975,24.2 C5.1 48.212,24.2 v1(49.013,25) 49.788,25.775 R15.2 ; DD1.36 C6.1 v1(52.7,13.8) ; D7.7@51.75,4.5 51.8,4.55 C21.1 v1(54,5.75) ; D8.2 57.15,1.15 v1(57.25,1.25) ; R37.2 R38.2 R34.2 ; D6.5 63.2,4 C22.1 v1(64.95,2.25)
  BOT w0.3: v1(13.8,12.8) C15.1 15,13.5 15.2,13.7 D5.4
  other v1: 59.025,19.75 59.025,21.75
+4V2_BAT: C4.1 C11.1 C12.2 D1.5 D4.1 D4.3 pad.+4V2_BAT R6.1 R13.2 | length 20.5
  TOP w0.3: D4.3 37.55,9.7 37.75,9.5 39.25,9.5 39.45,9.7 D4.1 39.45,12.1 C12.2 v1(40.5,12.25) ; pad.+4V2_BAT 39,28 39,28.5 C4.1 40.95,27.8 41.75,27 41.75,25.55 42.3,25 42.3,24.725 R6.1 ; R13.2 49.025,27.525 v1(49,27.5) 51.3,27.5 C11.1 52.395,28.405 D1.5
  other v1: 43.5,24.1 43.5,24.9
+5V: C1.1 C2.1 C3.1 D1.4 D1.8 R1.2 TP1.1 VD1.5 VD2.1 VD3.A VD4.A XS1.A4 XS1.A9 XS2.6 | length 31.2
  TOP w0.3: v1(44.25,11.75) 44.5,12 R1.2 ; v1(52.75,24.864) 53.019,24.595 D1.8 ; v1(58.5,15.8) C1.1 ; v1(58.595,27.844) 58.956,28.205 59.4,28.205 D1.4 ; v1(59.5,16.75) 59.5,15.95 C1.1 ; VD1.5 62.176,15.074 62.176,15.774 62,15.95 59.65,15.95 C1.1 ; TP1.1 63,7.275 63.4,7.675 VD2.1 63.406,9.006 64.006,9.006 v1(64.209,9.209) 64.209,10.259 64.463,10.513 65.113,10.513 XS1.A4 65.85,10.6 v1(66.5,11.25) ; C2.1 C3.1 ; XS1.A9 65.85,15.4 v1(66.5,14.75) ; v1(65.5,19.75) 67,19.75 67.5,19.25 68.25,19.25 68.775,19.775 VD4.A VD3.A
  BOT w0.3: v1(65.5,19.75) 64.5,20.75 64.5,21.5 65,22 65.93,22 XS2.6
  other v1: 63.05,19.75
ADC_CHARGE_LVL: C13.1 R5.4 R13.1 R14.2 | length 5.8
  TOP w0.3: R5.4 44.754,25.004 44.754,25.704 45.225,26.175 45.5,26.175 45.8,26.475 45.8,28.475 R14.2 R13.1
EPD_BUSY: R5.1 XS3.7 | length 59.7
  TOP w0.2: R5.1 46.258,25.008 46.633,25.008 v1(46.95,25.325)
  BOT w0.3: XS3.7 1.93,9.82 3.75,8 22.25,8 29.5,15.25 43,15.25 47.75,20 47.75,25 47.425,25.325 v1(46.95,25.325)
EPD_CS: R12.1 XS3.6 | length 47.7
  TOP w0.3: v1(41.75,21.75) 42.25,21.25 R12.1
  BOT w0.3: XS3.6 7.95,10.25 21,10.25 28.25,17.5 41.5,17.5 42.5,18.5 42.5,21 v1(41.75,21.75)
EPD_DC: R5.2 XS3.5 | length 58.9
  TOP w0.2: R5.2 45.794,24.956 45.794,24.642 45.937,24.5 v1(47,24.5)
  BOT w0.3: XS3.5 3.25,12.41 3.25,10.5 5,8.75 22,8.75 29.25,16 42.75,16 47,20.25 v1(47,24.5)
EPD_RESET: R5.3 XS3.8 | length 57.9
  TOP w0.2: R5.3 45.277,25.027 45.277,25.376 45.526,25.625 46.323,25.625 47,26.302 v1(47,27.5)
  BOT w0.3: XS3.8 6.16,9.5 21.5,9.5 28.75,16.75 42.25,16.75 46.25,20.75 46.25,26.75 v1(47,27.5)
GND: C1.2 C2.2 C3.2 C4.2 C5.2 C6.2 C9.2 C10.2 C11.2 C12.1 C13.2 C14.1 C15.2 C16.2 C17.2 C18.1 C19.2 C20.2 C21.2 C22.2 C23.2 D1.0 D1.3 D3.6 D3.7 D4.2 D5.6 D5.10 D5.11 D5.12 D5.13 D6.2 D7.6 D7.20 D7.21 D8.1 D8.7 D9.1 D9.7 DD1.8 DD1.23 DD1.35 DD1.47 DD1.49 R2.1 R3.2 R4.2 R9.1 R10.2 R11.2 R14.1 R32.2 R33.2 R41.2 R42.2 R44.2 TP2.1 TP4.1 VD1.2 VD2.2 VD5.K XS1.A1 XS1.A12 XS1.S1 XS2.4 XS3.1 | length 32.4
  TOP w0.3: DD1.23 45.9,16.75 48.15,19 v1(48.75,19) ; v1(46.25,16.75) 48.5,19 v1(48.75,19) ; DD1.8 48,19.75 v1(48.75,19) ; DD1.35 v1(51,16.75) v1(48.75,19) ; DD1.47 51,21.25 v1(48.75,19) ; R33.2 v1(56.475,20.75) ; C9.2 v1(56.5,22.75) ; v1(56.75,8) 56.75,8.081 56.825,8.156 D9.7 ; v1(57.15,2.65) D8.7 ; D8.1 v1(58.7,0.8) ; v1(58.5,14.2) C1.2 ; v1(58.5,26.75) 58.557,26.807 58.947,26.807 59.275,27.135 D1.3 ; v1(61.25,2.25) 61.575,1.925 61.575,1.475 C18.1@61.8,1.25 ; R3.2 v1(62.25,11.525) VD1.2
  BOT w0.3: D5.6 v1(13,15.95) ; XS2.4 67.95,23.7 v1(68,23.75)
  other v1: 66.5,1.25 41.25,1.75 54,1.75 43.75,2.25 51.75,2.25 40.25,3 53,3 45,3.25 50.5,3.25 66.5,3.25 42.25,3.5 65.5,4.25 36.75,4.5 66.5,5.25 38.325,5.375 68,6 69.75,6 36.75,6.25 65.5,6.25 40.5,6.5 58.25,7.25 68,8 45.25,8.25 50.25,8.25 0.75,9.5 61.5,9.75 68,9.75 69.75,9.75 55,10.25 58.5,10.25 13.8,11.2 49.5,11.25 56,11.25 57.5,11.25 52.5,12 36.5,12.25 55,12.25 42.5,13 44.5,13 38.3,13.2 56,13.25 45.25,14.75 21.75,15.25 68,16.25 69.75,16.25 6.75,16.5 23,16.5 60.5,17 64.5,17 56.75,17.75 68,18 41,18.25 8.25,18.5 60.25,18.75 51,19 68,20 60.25,20.75 48.75,21.5 51,21.5 43.5,22.75 7,24.25 25.25,24.25 50.9,25.1 7,25.5 25.25,25.5 64,26.75 42.5,27.5 44.25,27.5 55.75,28.75 56.75,28.75 57.75,28.75 64,28.75 51.25,29.25
GNDB: C7.2 D2.6 D3.2 D3.3 pad.GNDB | length 5.3
  TOP w0.3: v1(37.3,23.55) D2.6 37.3,25.55 37.5,25.75 pad.GNDB ; C7.2 42.55,26.475 42.85,26.175 42.875,26.175 v1(43.25,25.8)
  other v1: 38,18.75
I2C1_SCL: D7.9 D8.4 D9.4 R18.7 R37.1 | length 35.9
  TOP w0.25: D7.9@51.75,7 53,7 v1(53.25,6.75) 54.5,6.75 54.775,7.025 D9.4 55.525,6.275 55,5.75 55,1.35 D8.4 ; R18.7 v1(56.5,18.75) R37.1
  BOT w0.25: v1(53.25,6.75) 54,7.5 54,8 53.5,8.5 52,8.5 50.75,9.75 49,9.75 47.75,11 47.75,12.25 50,14.5 53.475,14.5 55.75,16.775 55.75,18 v1(56.5,18.75)
I2C1_SDA: D7.10 D8.3 D9.3 R18.8 R38.1 | length 39.9
  TOP w0.25: D7.10@51.75,8.25 52.75,8.25 v1(53.25,7.75) 56,7.75 56.175,7.575 D9.3 56.178,7.022 56.178,6.572 56.75,6 57.75,6 58.5,5.25 58.5,2.75 57.75,2 57,2 56.35,1.35 D8.3 ; R18.8 55.975,19.25 57.15,20.425 57.175,20.425 57.475,20.725 R38.1
  BOT w0.25: v1(53.25,7.75) 52,7.75 50.5,9.25 48.75,9.25 47.25,10.75 47.25,12.5 49.8,15.05 53.325,15.05 55,16.725 55,18.25 v1(56.5,19.75)
ISTOUCH: C19.1 D6.1 R18.5 R39.2 | length 18.1
  TOP w0.3: R18.5 55.75,17.75 57.75,15.75 57.75,13.75 58.25,13.25 60.25,13.25 60.5,13 60.5,11.725 R39.2 59.5,9.763 C19.1 60.5,7.8 60.5,6.25 59.7,5.45 D6.1
NetC7_1: C7.1 D2.5 R6.2 | length 5.9
  TOP w0.3: D2.5 38.25,24 38.5,23.75 40.225,23.75 R6.2 40.975,26.475 C7.1
NetC16_1: C16.1 DD1.22 | length 2.1
  TOP w0.3: C16.1 43.55,16.525 43.85,16.825 43.875,16.825 44.3,17.25 DD1.22
NetD1_1: D1.1 R10.1 | length 3.1
  TOP w0.3: D1.1 59.925,24.595 60.125,24.795 60.125,24.875 61.307,26.057 61.307,26.582 R10.1
NetD1_2: D1.2 R11.1 | length 3.9
  TOP w0.3: D1.2 59.925,25.865 60.125,26.065 60.125,26.125 60.75,26.75 60.75,28.025 61.175,28.45 61.2,28.45 61.475,28.725 R11.1
NetD1_6: D1.6 R8.2 | length 18.9
  TOP w0.3: v1(52.615,27.135) D1.6 ; v1(60.5,22.75) R8.2
  BOT w0.3: v1(52.615,27.135) 51.635,27.135 50,25.5 50,24 52.25,21.75 57,21.75 58,22.75 v1(60.5,22.75)
NetD1_7: D1.7 R7.2 | length 9.5
  TOP w0.3: D1.7 54.008,25.757 54.812,25.757 55,25.569 55,24.5 55.75,23.75 60.475,23.75 61.175,24.45 61.2,24.45 61.475,24.725 R7.2
NetD2_1: D2.1 D3.5 | length 8.6
  TOP w0.3: D3.5 37.275,16.225 36.5,17 36.5,21 37.3,21.8 D2.1
NetD2_2: D2.2 R9.2 | length 3.8
  TOP w0.3: D2.2 38.25,23 38.5,23.25 40.475,23.25 R9.2
NetD2_3: D2.3 D3.4 | length 3.8
  TOP w0.3: D3.4 37.275,21.025 37.5,21.25 39,21.25 39.2,21.45 D2.3
NetD3_1: D3.1 D3.8 | length 5.8
  TOP w0.3: D3.8 D3.1
NetD6_4: D6.4 R42.1 | length 3.2
  TOP w0.3: D6.4 62.3,2.45 62.5,2.25 63.725,2.25 63.975,2 R42.1
NetD6_6: D6.6 R41.1 | length 1.8
  TOP w0.3: D6.6 62.925,4.95 63.225,5.25 R41.1
NetD8_5: D8.5 R43.1 | length 1.5
  TOP w0.3: D8.5 55.55,4.05 55.975,4.475 R43.1
NetD9_5: D9.5 R44.1 | length 1.5
  TOP w0.3: D9.5 55.525,9.775 55.975,10.225 R44.1
NetDD1_10: DD1.10 R5.8 | length 2
  TOP w0.3: R5.8 46.274,23.976 46.524,23.976 47,23.5 DD1.10
NetDD1_11: DD1.11 R5.7 | length 2.1
  TOP w0.2: R5.7 45.75,23.655 46.005,23.4 46.35,23.4 46.5,23.25 DD1.11
NetDD1_12: DD1.12 R5.6 | length 1.9
  TOP w0.2: R5.6 45.25,23.475 45.95,22.775 45.95,22.5 DD1.12
NetDD1_13: DD1.13 R5.5 | length 2.5
  TOP w0.3: R5.5 44.75,23 45.3,22.45 DD1.13
NetDD1_14: DD1.14 R12.8 | length 1.5
  TOP w0.3: R12.8 DD1.14
NetDD1_15: DD1.15 R12.7 | length 1.5
  TOP w0.3: R12.7 DD1.15
NetDD1_16: DD1.16 R12.6 | length 1.5
  TOP w0.3: R12.6 43.85,20.25 DD1.16
NetDD1_17: DD1.17 R12.5 | length 1.5
  TOP w0.3: R12.5 DD1.17
NetDD1_20: DD1.20 R32.1 | length 1.8
  TOP w0.3: R32.1 DD1.20
NetDD1_30: DD1.30 R16.8 | length 1.5
  TOP w0.3: R16.8 DD1.30
NetDD1_32: DD1.32 R16.7 | length 1.8
  TOP w0.2: R16.7 49,14.5 49.5,15 DD1.32
NetDD1_33: DD1.33 R16.6 | length 1.8
  TOP w0.2: R16.6 49.5,14.364 50,14.864 DD1.33
NetDD1_34: DD1.34 R16.5 | length 1.8
  TOP w0.3: R16.5 50,14.05 50.05,14.1 50.1,14.1 50.5,14.5 DD1.34
NetDD1_37: DD1.37 R17.6 | length 1.8
  TOP w0.3: DD1.37 52.75,16.25 53.25,15.75 R17.6
NetDD1_38: DD1.38 R17.5 | length 1.6
  TOP w0.3: DD1.38 53.25,16.75 R17.5@53.605,16.395
NetDD1_39: DD1.39 R18.4 | length 1.8
  TOP w0.3: DD1.39 53.25,17.25 53.65,17.65 53.65,17.7 53.7,17.75 R18.4
NetDD1_42: DD1.42 R18.2 | length 1.5
  TOP w0.3: DD1.42 R18.2
NetDD1_43: DD1.43 R18.1 | length 1.5
  TOP w0.3: DD1.43 R18.1
NetDD1_44: DD1.44 R33.1 R34.1 | length 6.5
  TOP w0.3: DD1.44 52.975,19.75 R33.1 54.975,21.75 56.475,21.75 R34.1
NetR3_1: R3.1 XS1.A5 | length 2.6
  TOP w0.3: R3.1 64.025,11.75 XS1.A5
NetR4_1: R4.1 XS1.B5 | length 3.3
  TOP w0.3: R4.1 63.025,16.725 63.3,16.45 63.325,16.45 64.025,15.75 64.025,15.225 64.5,14.75 XS1.B5
NetR7_1: R7.1 VD3.K | length 5
  TOP w0.3: R7.1 65.35,24.75 VD3.K
NetR8_1: R8.1 VD4.K | length 5
  TOP w0.3: R8.1 63.75,22.75 64.5,22 66.076,22 67.076,21 67.1,21 VD4.K
NetR39_1: R39.1 VD5.A | length 2
  TOP w0.3: VD5.A 57.55,12.275 R39.1
NRST: C17.1 DD1.7 R15.1 XS2.1 | length 29.2
  TOP w0.3: DD1.7 48.5,23.25 48.75,23.5 49.275,23.5 49.7,23.925 49.7,23.95 49.975,24.225 R15.1 51.725,24.225 C17.1 52.5,24.2 v1(52.8,23.9)
  BOT w0.3: v1(52.8,23.9) 53.275,24.375 62.375,24.375 63,25 69,25 71.39,22.61 71.39,21.763 70.627,21 69.75,21 XS2.1@69.27,21.48
SPI1_CLK: D5.5 R12.2 XS3.3 | length 49.2
  TOP w0.3: v1(40,20.5) 40,20.75 40.5,21.25 41,21.25 41.5,20.75 R12.2
  BOT w0.3: XS3.3 3.16,17.5 5.25,17.5 5.75,17 5.75,15.25 7.5,13.5 14,13.5 14.1,13.6 D5.5 14.1,16.35 18.25,20.5 v1(40,20.5)
SPI1_CS: D5.2 R17.4 | length 46.4
  TOP w0.3: v1(35.25,14.25) v1(35.25,18.5) ; v1(54.25,17) 54.614,16.454 R17.4
  BOT w0.3: D5.2 17.4,15.65 20.25,18.5 v1(35.25,18.5) ; v1(35.25,14.25) 39,14.25 39.5,13.75 46.5,13.75 50.5,17.75 53.5,17.75 v1(54.25,17)
SPI1_MISO: D5.7 R12.3 | length 36.2
  TOP w0.3: v1(41,20.25) R12.3
  BOT w0.3: D5.7 11.9,16.15 18.25,22.5 39.25,22.5 41,20.75 v1(41,20.25)
SPI1_MOSI: D5.3 R12.4 XS3.4 | length 45.5
  TOP w0.3: v1(41.75,19.5) 42,19.75 R12.4
  BOT w0.3: XS3.4 4.47,15.53 8,12 15.598,12 16.3,12.702 16.3,15.8 20,19.5 v1(41.75,19.5)
SWCLK: R17.3 XS2.2 | length 21
  TOP w0.3: R17.3 55.65,15.75 v1(55.7,15.8)
  BOT w0.3: v1(55.7,15.8) 56.3,15.8 57.75,17.25 57.75,19.75 58.75,20.75 59.25,20.75 60.25,21.75 60.75,21.75 63.5,24.5 68.75,24.5 69.22,24.03 XS2.2
SWDIO: R16.4 XS2.3 | length 25.5
  TOP w0.3: R16.4 50.5,12.5 50.5,11.5 v1(51.5,10.5)
  BOT w0.3: v1(51.5,10.5) 53,10.5 54,11.5 55.25,11.5 56.25,12.5 61.25,12.5 66.5,17.75 66.5,20.03 XS2.3
TOUCHPAD: C18.2 D6.3 | length 6.8
  TOP w0.3: v1(58.75,1.75) 59.25,1.25 60.2,1.25 60.2,2.05 59.7,2.55 D6.3
  BOT w0.2: v1(58.75,1.75) 58.75,4.5 59,4.75
USB_DN: R16.2 VD1.4 | length 19.6
  TOP w0.3: v1(48.75,12.25) 49,12.5 R16.2 ; v1(60.5,14) 62.75,14 63.2,14.45 VD1.4
  BOT w0.3: v1(48.75,12.25) 48.75,11 49.25,10.5 50.25,10.5 51,11.25 52.75,11.25 55.75,14.25 57,14.25 57.75,13.5 60,13.5 v1(60.5,14)
USB_DN_IN: VD1.3 XS1.A7 XS1.B7 | length 4.5
  TOP w0.3: XS1.B7 63.45,12.25 VD1.3 63.2,12.7 63.75,13.25 XS1.A7
USB_DP: R16.3 VD1.6 | length 13.5
  TOP w0.3: R16.3 49.5,12.5 v1(49.75,12.25) ; v1(60.5,15) VD1.6
  BOT w0.3: v1(49.75,12.25) 50.5,13 53,13 55,15 v1(60.5,15)
USB_DP_IN: VD1.1 XS1.A6 XS1.B6 | length 7.7
  TOP w0.3: VD1.1 61.3,13.3 61.5,13.5 63.25,13.5 63.5,13.75 XS1.B6 66,13.75 66.25,13.5 66.25,13 66,12.75 XS1.A6
USB_VBUS: R1.1 R2.2 R16.1 | length 3.3
  TOP w0.3: R1.1 47.025,12.901 ; R2.2 47.025,13.026 47.025,12.901 ; R16.1 47.124,13 47.025,12.901
pads on no net: D2.4 D4.4 D5.1 D5.8 D5.9 D5.14 D5.15 D7.1 D7.2 D7.3 D7.4 D7.5 D7.8 D7.11 D7.12 D7.13 D7.14 D7.15 D7.16 D7.17 D7.18 DD1.2 DD1.3 DD1.4 DD1.5 DD1.6 DD1.18 DD1.19 DD1.21 DD1.25 DD1.26 DD1.27 DD1.28 DD1.29 DD1.31 DD1.40 DD1.41 DD1.45 DD1.46 R17.1 R17.2 R17.7 R17.8 R18.3 R18.6 XS1. XS1.A8 XS1.B8 XS2. XS2.5

## Polygon pours and split planes (outlines as drawn)
GND on TOP "GND_L01_P006" (solid, remove dead copper, pour order 6): 0,30 72,30 72,0 0,0
GND on BOT "GND_L04_P007" (solid, remove dead copper, pour order 7): 0,30 72,30 72,0 0,0
GNDB on GND "NONET_L-01_P-001" (solid, pour order 8): 36.5,26.25 36.5,18.5 ccw(c37,18.5) 37,18 38.5,18 ccw(c38.5,18.5) 39,18.5 39,24.5 cw(c39.5,24.5) 39.5,25 44,25 ccw(c44,25.5) 44.5,25.5 44.5,26.25 ccw(c44,26.25) 44,26.75 37,26.75 ccw(c37,26.25)
GND on GND "GND_L02_P012" (solid, remove dead copper, pour order 12): 0,30 72,30 72,0 0,0
+4V2_BAT on PWR "+4V2_BAT_L03_P009" (solid, pour order 9): 49.5,30 49.5,27.5 cw(c49,27.5) 49,27 43.25,27 ccw(c43.25,26.5) 42.75,26.5 42.75,25.75 ccw(c43.25,25.75) 43.25,25.25 43.5,25.25 cw(c43.5,24.75) 44,24.75 44,15.75 cw(c43.5,15.75) 43.5,15.25 41.75,15.25 ccw(c41.75,14.75) 41.25,14.75 41.25,11.25 cw(c40.75,11.25) 40.75,10.75 40,10.75 cw(c40,11.25) 39.5,11.25 39.5,30
+5V on PWR "NONET_L-01_P-001" (solid, pour order 10): 72,30 43.75,30 43.75,11.25 ccw(c44.25,11.25) 44.25,10.75 47.75,10.75 ccw(c47.75,11.25) 48.25,11.25 48.25,25.25 cw(c48.75,25.25) 48.75,25.75 51.25,25.75 cw(c51.25,25.25) 51.75,25.25 51.75,25 ccw(c52.25,25) 52.25,24.5 59.25,24.5 cw(c59.25,24) 59.75,24 59.75,18 cw(c59.25,18) 59.25,17.5 58.25,17.5 ccw(c58.25,17) 57.75,17 57.75,15.25 ccw(c58.25,15.25) 58.25,14.75 62.75,14.75 cw(c62.75,14.25) 63.25,14.25 63.25,8.75 ccw(c63.75,8.75) 63.75,8.25 72,8.25
+3V3 on PWR "+3V3_L03_P011" (solid, remove dead copper, pour order 11): 0,30 72,30 72,0 0,0

## Other copper
TOP:
  region net +3V3: 54.45,22.35 54.45,23.125 ccw(c54.3,23.125) 54.3,23.275 51.75,23.275 ccw(c51.75,22.875) 51.35,22.875 51.35,22.1 ccw(c51.416,22.091) 51.425,22.025 51.6,22.025 cw(c51.6,21.85) 51.775,21.85 51.775,21.675 ccw(c51.85,21.675) 51.85,21.6 52.55,21.6 ccw(c52.55,21.675) 52.625,21.675 52.625,22.075 cw(c52.775,22.075) 52.775,22.225 54.325,22.225 ccw(c54.325,22.35)
  region net GNDB: 37.8,20.9 38.7,20.9 cw(c38.7,20.8) 38.8,20.8 38.8,18.75 cw(c38.5,18.75) 38.5,18.45 38,18.45 cw(c38,18.75) 37.7,18.75 37.7,20.8 cw(c37.8,20.8)
  region net +4V2_BAT: 43.8,24.9 43.8,24.1 cw(c43.5,24.1) 43.5,23.8 42.35,23.8 cw(c42.35,24.1) 42.05,24.1 42.05,25.2 43.5,25.2 cw(c43.5,24.9)
  pour cut-out: 33.5,29 33.5,1 34,1 34,29
  pour cut-out: 41.5,19.25 39.5,19.25 39.5,19.5 41.5,19.5
GND:
  pour cut-out: 33.5,29 33.5,1 34,1 34,29
PWR:
  pour cut-out: 33.5,29 33.5,23.75 34,23.75 34,29
  pour cut-out: 33.5,14 33.5,1 34,1 34,14
BOT:
  pour cut-out: 33.5,14 33.5,1 34,1 34,14
  pour cut-out: 33.5,29 33.5,23.75 34,23.75 34,29
  region net TOUCHPAD: 271 vertices and 0 holes, not listed, extent 58.238,4.267 64.673,8.386
  region net TOUCHPAD: 61.584,3.817 61.584,3.688 61.713,3.688 61.713,3.624 61.777,3.624 61.777,3.495 61.842,3.495 61.842,3.238 61.777,3.238 61.777,3.109 61.713,3.109 61.713,3.045 61.584,3.045 61.584,2.98 61.327,2.98 61.327,3.045 61.198,3.045 61.198,3.109 61.134,3.109 61.134,3.238 61.07,3.238 61.07,3.495 61.134,3.495 61.134,3.624 61.198,3.624 61.198,3.688 61.327,3.688 61.327,4.267 61.584,4.267 61.584,3.881
  region net TOUCHPAD: 62.936,4.267 63,4.267 63,3.688 63.129,3.688 63.129,3.624 63.193,3.624 63.193,3.495 63.257,3.495 63.257,3.238 63.193,3.238 63.193,3.109 63.129,3.109 63.129,3.045 63,3.045 63,2.98 62.743,2.98 62.743,3.045 62.614,3.045 62.614,3.109 62.55,3.109 62.55,3.238 62.485,3.238 62.485,3.495 62.55,3.495 62.55,3.624 62.614,3.624 62.614,3.688 62.743,3.688 62.743,4.267 62.871,4.267
  region net TOUCHPAD: 59.911,3.881 59.911,4.267 60.169,4.267 60.169,3.688 60.297,3.688 60.297,3.624 60.362,3.624 60.362,3.495 60.426,3.495 60.426,3.238 60.362,3.238 60.362,3.109 60.297,3.109 60.297,3.045 60.169,3.045 60.169,2.98 59.911,2.98 59.911,3.045 59.783,3.045 59.783,3.109 59.718,3.109 59.718,3.238 59.654,3.238 59.654,3.495 59.718,3.495 59.718,3.624 59.783,3.624 59.783,3.688 59.911,3.688 59.911,3.817

## Silkscreen, mask and mechanical layers (free items; w line width, h text height)
Top Overlay:
  lines w0.15: 36.975,3.725 36.975,0.5 39.25,0.5 40.025,0.5 40.025,5.275 ; 38.551,0.5 38.551,3.725
  text "GND" at 38.551,0.5 h1.3 r90
  text "+3V3" at 40.076,0.5 h1.3 r90
Top Solder:
  region: 45.75,22.975 45.75,22 44.775,22 44.775,16 45.75,16 45.75,15.025 51.75,15.025 51.75,16 52.725,16 52.725,22 51.75,22 51.75,22.975
  region: 57.75,6.675 55.25,6.675 55.25,7.375 57.75,7.375
  region: 57.75,8.625 55.25,8.625 55.25,9.325 57.75,9.325
  region: 42.475,19.525 42.475,21.475 43.025,21.475 43.025,19.525
  region: 43.475,19.525 43.475,21.475 44.025,21.475 44.025,19.525
  region: 50.225,12.725 48.275,12.725 48.275,13.275 50.225,13.275
  region: 50.225,13.725 48.275,13.725 48.275,14.275 50.225,14.275
  region: 54.475,14.525 54.475,16.475 55.025,16.475 55.025,14.525
  region: 53.475,14.525 53.475,16.475 54.025,16.475 54.025,14.525
  region: 54.475,17.525 54.475,19.475 55.025,19.475 55.025,17.525
  region: 53.475,17.525 53.475,19.475 54.025,19.475 54.025,17.525
  region: 44.525,24.275 46.475,24.275 46.475,23.725 44.525,23.725
  region: 44.525,25.275 46.475,25.275 46.475,24.725 44.525,24.725
Bottom Solder:
  region: 69 vertices and 17 holes, not listed, extent 5.421,0.608 12.127,7.314
  region: 7.453,6.095 7.453,5.892 7.453,5.688 7.453,5.485 7.453,5.282 6.437,5.282 6.437,5.485 6.437,5.688 6.437,5.892 6.437,6.095 6.437,6.298 7.453,6.298 hole: 7.25,6.095 6.64,6.095 6.64,5.892 6.64,5.688 6.64,5.485 7.25,5.485 7.25,5.688 7.25,5.892
  region: 11.111,6.095 11.111,5.892 11.111,5.688 11.111,5.485 11.111,5.282 10.095,5.282 10.095,5.485 10.095,5.688 10.095,5.892 10.095,6.095 10.095,6.298 11.111,6.298 hole: 10.908,6.095 10.298,6.095 10.298,5.892 10.298,5.688 10.298,5.485 10.908,5.485 10.908,5.688 10.908,5.892
  region: 7.453,2.437 7.453,2.234 7.453,2.031 7.453,1.828 7.453,1.624 6.437,1.624 6.437,1.828 6.437,2.031 6.437,2.234 6.437,2.437 6.437,2.64 7.453,2.64 hole: 7.25,2.437 6.64,2.437 6.64,2.234 6.64,2.031 6.64,1.828 7.25,1.828 7.25,2.031 7.25,2.234
  region: 10.298,2.844 10.298,2.64 10.298,2.437 9.688,2.437 9.688,2.64 9.688,2.844 9.688,3.047 10.298,3.047 hole: 10.095,2.844 9.892,2.844 9.892,2.64 10.095,2.64
  region: 8.469,4.469 8.469,4.266 8.672,4.266 8.672,4.063 8.469,4.063 8.469,4.266 8.266,4.266 8.266,4.469 8.266,4.672 8.469,4.672
  region: 9.3,15.425 9.3,14.475 9.1,14.475 9.1,15.425
  text "t1ltmare" at 12.343,0.608 h1.4 r270
Border:
  lines w0.8: 0,2.8 ccw(c2.8,2.8) 2.8,0 ; 0,2.8 ccw(c2.8,2.8) 2.8,0 ; 0,2.8 0,27.2 ; 0,2.8 0,27.2 ; 0,27.2 cw(c2.8,27.2) 2.8,30 ; 0,27.2 cw(c2.8,27.2) 2.8,30 ; 2.8,0 69.2,0 ; 2.8,0 69.2,0 ; 2.8,30 69.2,30 ; 2.8,30 69.2,30 ; 69.2,0 ccw(c69.199,2.801) 72,2.8 ; 69.2,0 ccw(c69.199,2.801) 72,2.8 ; 69.2,30 cw(c69.2,27.2) 72,27.2 ; 69.2,30 cw(c69.2,27.2) 72,27.2 ; 72,2.8 72,4.1 ; 72,2.8 72,4.1 ; 72,4.1 72,25.9 ; 72,25.9 72,27.2 ; 72,25.9 72,27.2
Assembly:
  circle w0.15: c2.8,27.2 r2.8
  circle w0.15: c2.8,2.8 r2.8
  circle w0.15: c69.2,2.8 r2.8
  circle w0.15: c69.2,27.2 r2.8
  circle w0.013: c1.93,13.73 r0.406
  circle w0.013: c2.8,2.8 r1.6
  circle w0.013: c1.93,11.19 r0.406
  circle w0.013: c1.93,16.27 r0.406
  circle w0.013: c1.93,18.81 r0.406
  circle w0.013: c2.8,27.2 r1.6
  circle w0.013: c4.47,13.73 r0.406
  circle w0.013: c69.2,2.8 r1.6
  circle w0.013: c4.47,11.19 r0.406
  circle w0.013: c4.47,16.27 r0.406
  circle w0.013: c4.47,18.81 r0.406
  circle w0.013: c69.2,27.2 r1.6
  circle w0.013: c2.8,2.8 r1.6
  circle w0.013: c2.8,27.2 r1.6
  circle w0.013: c69.2,27.2 r1.6
  circle w0.013: c69.2,2.8 r1.6
  circle w0.013: c1.93,11.19 r0.406
  circle w0.013: c4.47,11.19 r0.406
  circle w0.013: c4.47,13.73 r0.406
  circle w0.013: c1.93,13.73 r0.406
  circle w0.013: c1.93,16.27 r0.406
  circle w0.013: c4.47,16.27 r0.406
  circle w0.013: c4.47,18.81 r0.406
  circle w0.013: c1.93,18.81 r0.406
  lines w0.01: 1.2,2.8 4.4,2.8 ; 1.2,27.2 4.4,27.2 ; 2.8,1.2 2.8,2.8 2.8,4.4 ; 2.8,25.6 2.8,25.6 2.8,27.2 2.8,28.8 2.8,28.8 ; 67.6,2.8 70.8,2.8 ; 67.6,27.2 70.8,27.2 ; 69.2,1.2 69.2,2.8 69.2,4.4 ; 69.2,25.6 69.2,27.2 69.2,28.8
  lines w0.013: 0,2.8 ccw(c2.8,2.8) 2.8,0 ; 0,2.8 ccw(c2.8,2.8) 2.8,0 ; 0,2.8 0,27.2 ; 0,2.8 0,27.2 ; 0,27.2 cw(c2.8,27.2) 2.8,30 ; 0,27.2 cw(c2.8,27.2) 2.8,30 ; 2.8,0 69.2,0 ; 2.8,0 69.2,0 ; 2.8,30 69.2,30 ; 2.8,30 69.2,30 ; 68.6,7.5 68.6,22.5 ; 68.6,7.5 72,4.1 ; 68.6,7.5 68.6,22.5 ; 68.6,7.5 72,4.1 ; 68.6,22.5 72,25.9 ; 68.6,22.5 72,25.9 ; 69.2,0 ccw(c69.199,2.801) 72,2.8 ; 69.2,0 ccw(c69.199,2.801) 72,2.8 ; 69.2,30 cw(c69.2,27.2) 72,27.2 ; 69.2,30 cw(c69.2,27.2) 72,27.2 ; 72,2.8 72,4.1 ; 72,2.8 72,4.1 ; 72,25.9 72,27.2 ; 72,25.9 72,27.2 ; 1.77,11.03 2.09,11.03 2.09,11.35 1.77,11.35 1.77,11.03 ; 1.77,13.57 2.09,13.57 2.09,13.89 1.77,13.89 1.77,13.57 ; 1.77,16.11 2.09,16.11 2.09,16.43 1.77,16.43 1.77,16.11 ; 1.77,18.65 2.09,18.65 2.09,18.97 1.77,18.97 1.77,18.65 ; 4.31,11.03 4.63,11.03 4.63,11.35 4.31,11.35 4.31,11.03 ; 4.31,13.57 4.63,13.57 4.63,13.89 4.31,13.89 4.31,13.57 ; 4.31,16.11 4.63,16.11 4.63,16.43 4.31,16.43 4.31,16.11 ; 4.31,18.65 4.63,18.65 4.63,18.97 4.31,18.97 4.31,18.65
  lines w0.3: 6.25,0 6.25,30 36.25,30 36.25,0 6.25,0
  text "BATTERY" at 11.113,13.399 h5